# EAGLE board TinkerCAD Traffic Light Junction (EAGLE 9.7.0)

Size 183.67 x 211.01 mm. Coordinates in mm from the lower left corner, seen from the top.
Outline: 0,0 183.67,0 183.67,211.01 0,211.01 0,0
Copper layers (1*16): Top 0.035mm / dielectric 1.5mm / Bottom 0.035mm
Design rules "default": minimum track width 6mil, minimum drill 0.35mm, track to track 6mil, track to pad 6mil, pad to pad 6mil, via to via 6mil, smd to smd 6mil, copper to edge 40mil, drill to drill 6mil, minimum pad ring 10mil, minimum via ring 8mil, stop-mask expansion 4mil, vias tented up to drill 0mil, thermal gap 10mil

## Footprints (pad centres in the part's own frame; a part is rotated, then mirrored left to right if it is on the bottom)
LEDRD254W60D565H860B = drill 0.981 pad 1.581: 1 -1.27,0; 2 1.27,0
LEDRD254W60D565H860B_Y = drill 0.981 pad 1.581: 1 -1.27,0; 2 1.27,0
LEDRD254W60D565H860B_G = drill 0.981 pad 1.581: 1 -1.27,0; 2 1.27,0
RESAD1016W63L850D250B = drill 0.83 pad 1.43: 1 -5.08,0; 2 5.08,0
SWITCH-MOMENTARY-PTH-6.5MM = drill 1.016 pad 1.88: 1 -3.251,2.261; 2 3.251,2.261; 3 -3.251,-2.261; 4 3.251,-2.261
ARDUINO-UNO-R3-SHIELD = drill 1.016 pad 1.88: 3.3V 24.13,-2.54; 5V 24.13,0; A0 24.13,12.7; A1 24.13,15.24; A2 24.13,17.78; A3 24.13,20.32; A4 24.13,22.86; A5 24.13,25.4; AREF -24.13,-13.97; D2 -24.13,20.32; D3 -24.13,17.78; D4 -24.13,15.24; D5 -24.13,12.7; D6 -24.13,10.16; D7 -24.13,7.62; D8 -24.13,3.81; D9 -24.13,1.27; D10 -24.13,-1.27; D11 -24.13,-3.81; D12 -24.13,-6.35; D13 -24.13,-8.89; GND@0 24.13,2.54; GND@1 24.13,5.08; GND@2 -24.13,-11.43; IOREF 24.13,-7.62; NC 24.13,-10.16; RES 24.13,-5.08; RX -24.13,25.4; SCL -24.13,-19.05; SDA -24.13,-16.51; TX -24.13,22.86; VIN 24.13,7.62

## Placement (x,y rotation side)
D1  RED  [LEDRD254W60D565H860B]  111.57,156.04 180 top
D2  YELLOW  [LEDRD254W60D565H860B_Y]  119.19,156.04 180 top
D3  GREEN  [LEDRD254W60D565H860B_G]  126.81,156.04 180 top
D4  RED  [LEDRD254W60D565H860B]  134.43,168.74 180 top
D5  YELLOW  [LEDRD254W60D565H860B_Y]  142.05,168.74 180 top
D6  GREEN  [LEDRD254W60D565H860B_G]  149.67,168.74 180 top
D7  RED  [LEDRD254W60D565H860B]  169.99,156.04 180 top
D8  GREEN  [LEDRD254W60D565H860B_G]  177.61,156.04 180 top
D9  RED  [LEDRD254W60D565H860B]  129.56,29.58 180 top
D10  YELLOW  [LEDRD254W60D565H860B_Y]  137.18,29.58 180 top
D11  GREEN  [LEDRD254W60D565H860B_G]  144.8,29.58 180 top
R1  1k  [RESAD1016W63L850D250B]  110.3,145.88 90 top
R2  1k  [RESAD1016W63L850D250B]  117.92,145.88 90 top
R3  1k  [RESAD1016W63L850D250B]  125.54,145.88 90 top
R4  1k  [RESAD1016W63L850D250B]  133.16,145.88 90 top
R5  1k  [RESAD1016W63L850D250B]  140.78,145.88 90 top
R6  1k  [RESAD1016W63L850D250B]  148.4,145.88 90 top
R7  1k  [RESAD1016W63L850D250B]  168.72,145.88 90 top
R8  1k  [RESAD1016W63L850D250B]  176.34,145.88 90 top
R9  1k  [RESAD1016W63L850D250B]  128.29,16.88 90 top
R10  1k  [RESAD1016W63L850D250B]  135.91,16.88 90 top
R11  1k  [RESAD1016W63L850D250B]  143.53,16.88 90 top
S1  SWITCH_MOMENTARY  [SWITCH-MOMENTARY-PTH-6.5MM]  161.1,154.77 90 top
U1  ARDUINO-UNO-R3-SHIELD  [ARDUINO-UNO-R3-SHIELD]  31.1,163.12 180 top
U2  ARDUINO-UNO-R3-SHIELD  [ARDUINO-UNO-R3-SHIELD]  29.84,34.52 180 top

## Library data of the parts
D1 D4 D7 D9 = Tinkercad; CATEGORY: Opto-Electronic; SUB-CATEGORY: LED; VALUE: LED_RED
D2 D5 D10 = Tinkercad; CATEGORY: Opto-Electronic; SUB-CATEGORY: LED; VALUE: LED_YELLOW
D3 D6 D8 D11 = Tinkercad; CATEGORY: Opto-Electronic; SUB-CATEGORY: LED; VALUE: LED_GREEN
R1-R11 S1 U1 U2 = Tinkercad

## Nets
D1_C: D1.2 R1.2
D2_C: D2.2 R2.2
D3_C: D3.2 R3.2
D4_C: D4.2 R4.2
D5_C: D5.2 R5.2
D6_C: D6.2 R6.2
D7_C: D7.2 R7.2
D8_C: D8.2 R8.2
D9_C: D9.2 R9.2
D10_C: D10.2 R10.2
D11_C: D11.2 R11.2
U1_A4: U1.A4 U2.A4
U1_D2: D7.1 U1.D2
U1_D3: D6.1 U1.D3
U1_D4: D5.1 U1.D4
U1_D5: D4.1 U1.D5
U1_D6: D3.1 U1.D6
U1_D7: D2.1 U1.D7
U1_D8: D1.1 U1.D8
U1_D9: D8.1 U1.D9
U1_D10: S1.3 S1.4 U1.D10
U2_A5: U1.A5 U2.A5
U2_D3: D11.1 U2.D3
U2_D4: D10.1 U2.D4
U2_D5: D9.1 U2.D5
U2_GND: R1.1 R2.1 R3.1 R4.1 R5.1 R6.1 R7.1 R8.1 R9.1 R10.1 R11.1 S1.1 S1.2 U1.GND@0 U1.GND@1 U1.GND@2 U2.GND@0 U2.GND@1 U2.GND@2

## Tracks (layer width: path | path; a pad name or v marks a point on that pad's centre or on a via)
D1_C  (1 unrouted)
D2_C  (1 unrouted)
D3_C  (1 unrouted)
D4_C  (1 unrouted)
D5_C  (1 unrouted)
D6_C  (1 unrouted)
D7_C  (1 unrouted)
D8_C  (1 unrouted)
D9_C  (1 unrouted)
D10_C  (1 unrouted)
D11_C  (1 unrouted)
U1_A4  (1 unrouted)
U1_D2  (1 unrouted)
U1_D3  (1 unrouted)
U1_D4  (1 unrouted)
U1_D5  (1 unrouted)
U1_D6  (1 unrouted)
U1_D7  (1 unrouted)
U1_D8  (1 unrouted)
U1_D9  (1 unrouted)
U1_D10  (2 unrouted)
U2_A5  (1 unrouted)
U2_D3  (1 unrouted)
U2_D4  (1 unrouted)
U2_D5  (1 unrouted)
U2_GND  (18 unrouted)